# Altium PCB PCB1.PcbDoc
Units mil, origin at the board's own origin, x right, y up, seen from the top; angles counter-clockwise.
Board outline 2674.56 x 3560.03 mil, 2 copper layers (Top Layer, Bottom Layer); 42 components, 36 nets, 219 pads, 0 vias.
Unrouted connection lines stored in the file: 99.
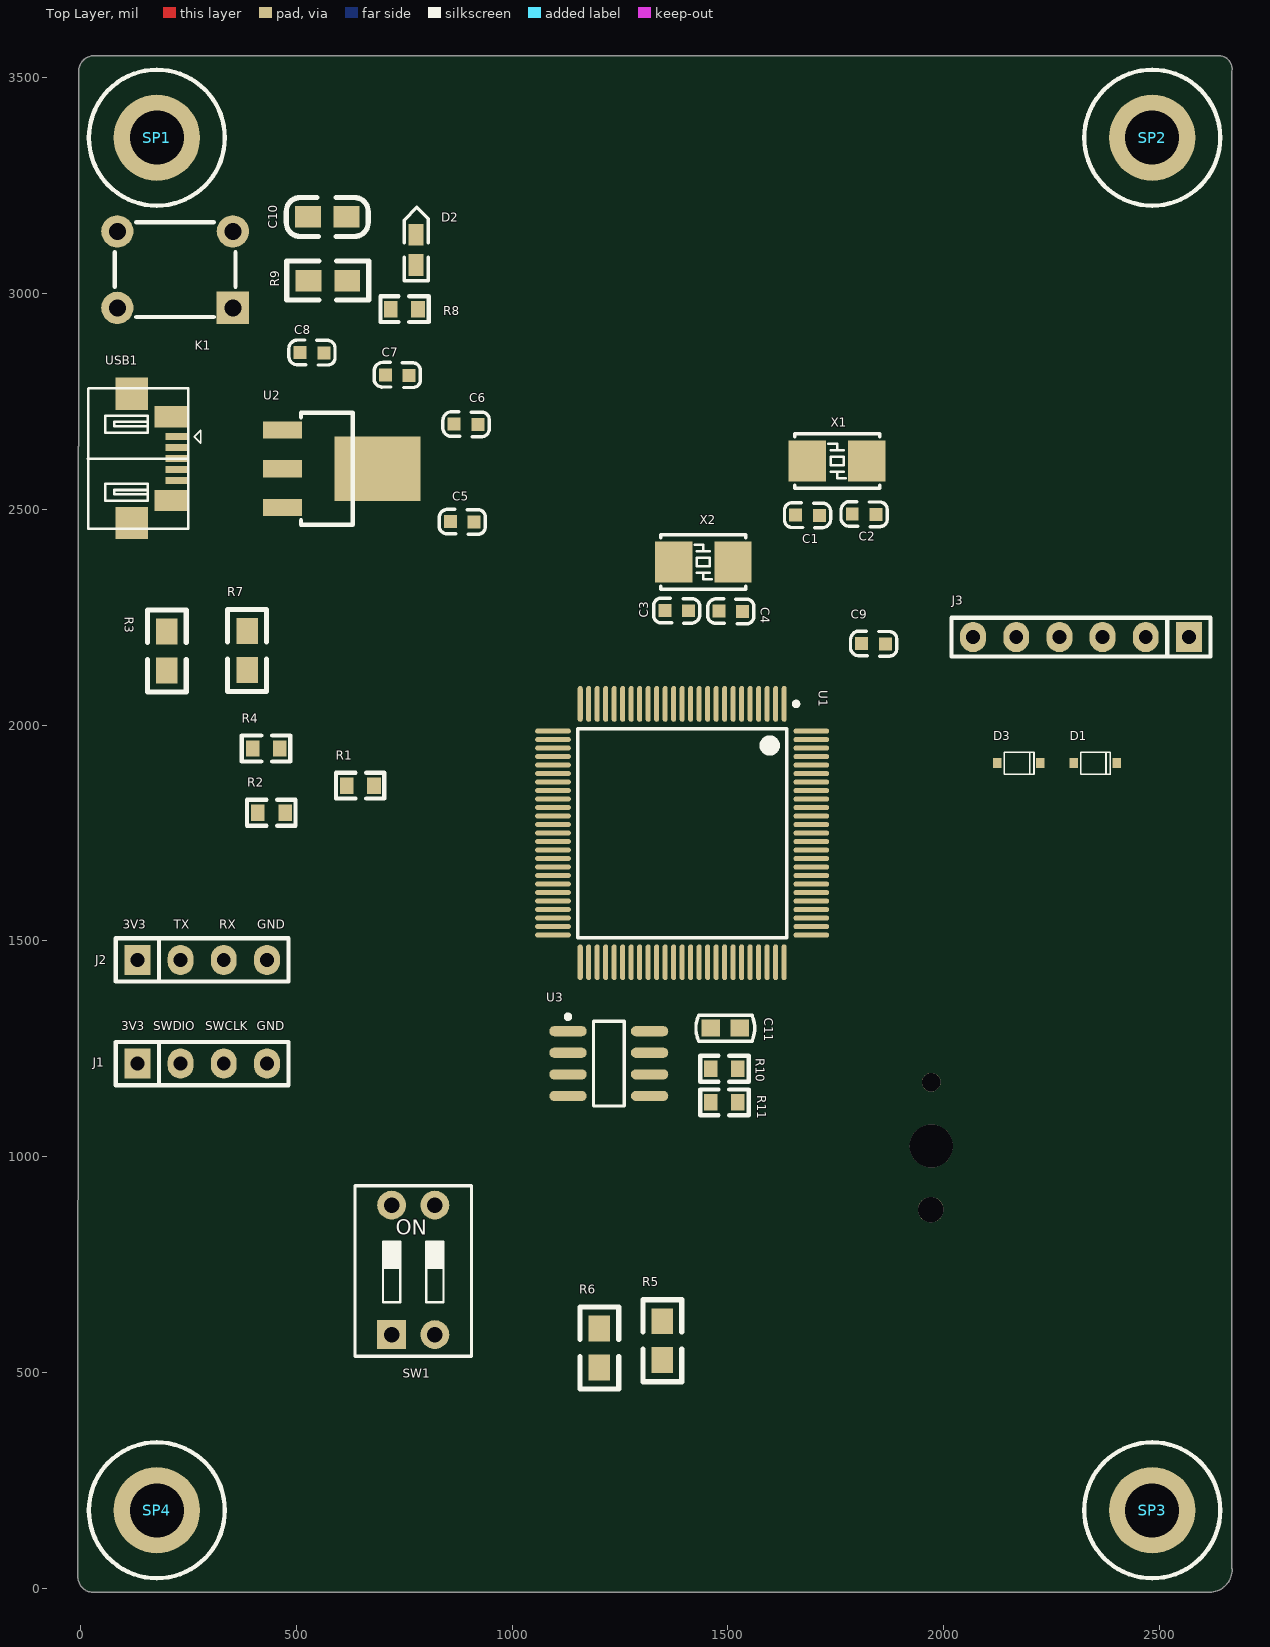
[diagram p0: Top Layer view]
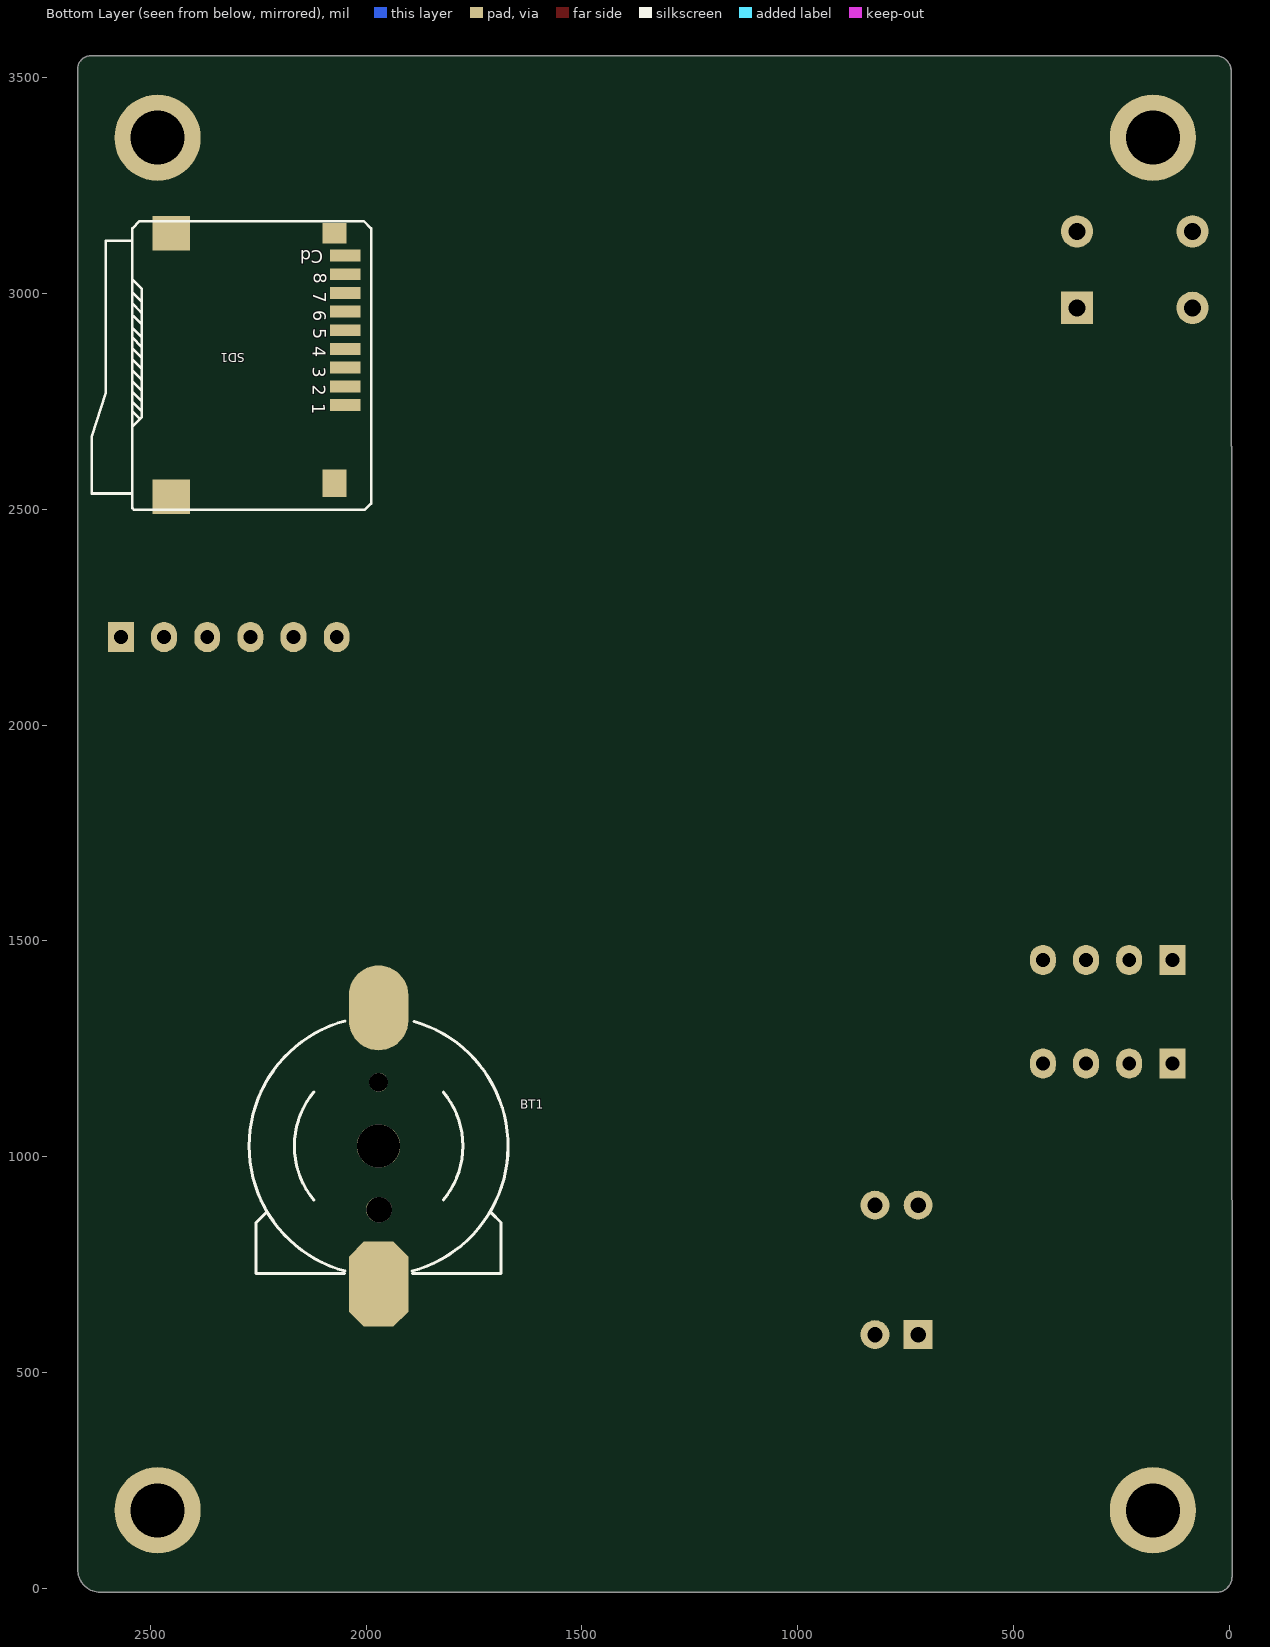
[diagram p1: Bottom Layer view, seen from below]

## Layer stack, top to bottom
Top Solder: solder mask 0.4, Solder Resist, Dk 3.5
Top Layer: signal copper 1.4
Dielectric 1: dielectric 12.6, FR-4, Dk 4.8
Bottom Layer: signal copper 1.4
Bottom Solder: solder mask 0.4, Solder Resist, Dk 3.5

## Board outline
-6.01,25.03 ccw(c30,27) 28.05,-9.01 ccw(c28.32,-4) 28.32,-9.02 2611.2,-9.01 ccw(c2611.2,-4) 2611.54,-9 ccw(c2615,44) 2668.12,44 ccw(c2663.1,44) 2667.74,45.9 2667.74,3515.93 ccw(c2662.84,3516.99) 2667.82,3516.41 ccw(c2637,3520) 2668.03,3520 ccw(c2637,3520) 2636.12,3551.02 32,3551.02 ccw(c32,3515) -3.47,3521.26 ccw(c1.01,3519) -4.01,3519 -6.44,27.08 ccw(c-1.43,27.07)

## Design rules (kind name [scope] priority, off if disabled: settings)
Clearance [All] p1: gap=8 ignorepadtopadclearanceinfootprint=FALSE
PolygonConnect [All] p1: connectstyle=Relief reliefconductorwidth=10 reliefentries=4 polygonreliefangle="90 Angle" airgapwidth=10
RoutingVias [All] p1: holewidth=8 width=10 viastyle="Through Hole" minholewidth=5 minwidth=9 maxholewidth=20 maxwidth=20
SolderMaskExpansion [All] p1: expansion=4 istentingtop=FALSE
Width [All] p1: maxlimit=15 minlimit=5 preferedwidth=8
30 further rules are at their usual default settings.

## Classes and differential pairs
component class Sheet1: BT1 C1 C2 C3 C4 C5 C6 C7 C8 C9 C10 C11 D1 D2 D3 J1 J2 J3 K1 R1 R2 R3 R4 R7 R8 R10 R11 SD1 SP1 SP2 SP3 SP4 SW1 U1 U2 U3 USB1 X1 X2

## Components (designator, comment, footprint, x,y, rotation, side; value= is the part's Value field where it differs from the comment)
BT1 "Battery" CR1220 1971,1025 r180 bottom
C1 "CAP" 0603C 1656.79,2487.35 r0 top
C2 "CAP" 0603C 1843.21,2487.65 r180 top
C3 "CAP" 0603C 1353.79,2266.35 r0 top
C4 "CAP" 0603C 1534.21,2262.65 r180 top
C5 "CAP" 0603C 912,2470 r180 top
C6 "CAP" 0603C 921,2696 r180 top
C7 "CAP" 0603C 761.54,2810 r180 top
C8 "CAP" 0603C 564,2862 r180 top
C9 "0.1uF" 0603C 1865.21,2187.65 r180 top
C10 "0.1uF" 0805C 616,3177 r180 top
C11 "Cap" C-RAD-0603 1494,1298 r180 top value=0.1uF
D1 "DIODE" SOD-323 2301,1912 r0 top
D2 "LED" LED-0603G 778,3066 r90 top
D3 "DIODE" SOD-323 2124,1912 r0 top
J1 "Pin HDR1X4" "Pin HDR1X4/2.54mm-S" 132,1216 r90 top
J2 "Pin HDR1X4" "Pin HDR1X4/2.54mm-S" 132,1456 r90 top
J3 "Female HDR1X6" Fe-HDR1X6/2.54-S 2568,2204 r180 top
K1 "KEY" DIP-6X6X5 353,2966.83 r180 top
R1 "1.5K" 0603R 617.01,1860 r0 top
R2 "22R" 0603R 411,1797 r0 top
R3 "10K" 0805R 200,2217 r270 top
R4 "22R" 0603R 399.01,1946 r0 top
R5 "4.7K" 0805R 1348,529 r90 top
R6 "4.7K" 0805R 1202,512 r90 top
R7 "10K" 0805R 386,2218 r270 top
R8 "510R" 0603R 782,2964 r180 top
R9 "4.7K" 0805R 528,3030 r0 top
R10 "4.7K" 0603R 1523,1204 r180 top
R11 "4.7K" 0603R 1523,1126 r180 top
SD1 "MicroSD" "Micro SD" 2451,3139.24 r270 bottom
SP1 "M3铜柱" M3x5_L 177,3361 r0 top
SP2 "M3铜柱" M3x5_L 2483,3361 r0 top
SP3 "M3铜柱" M3x5_L 2483,181 r0 top
SP4 "M3铜柱" M3x5_L 177,181 r0 top
SW1 "CSW-2P" "CSW DIP-2P" 771,738 r0 top
U1 "STM32F407V" LQFP-100_M 1394,1750 r270 top
U2 "AMS1117" SOT223 468,2594 r270 top
U3 "AT24C02" SOIC8_N 1224,1216 r0 top
USB1 "Micro-USB" USB-MICRO_A 224,2668.5 r270 top
X1 "XTAL-2P" "OSC 5032-2P" 1753,2612 r180 top
X2 "XTAL-2P" "OSC 5032-2P" 1443,2378 r180 top

## Footprints (in the part's own frame and the unit in brackets; to place one, negate y for a bottom-side part, rotate by r counter-clockwise, add the part's x,y. Pads: shape width x height; smd on the part's side, far side on the other; paste and mask are expansions set on the pad)
0603C [mil]
  rect 30x30 smd: 1(0.21,-0.35) 2(55.21,-1.35)
  silkscreen extent -26,-30 81,28, body extent -1,-15 62,17, height 12
0603R [mm]
  rect 0.8x0.965 smd: 1(0,0) 2(1.6,0)
  silkscreen extent -0.64,-0.76 2.21,0.76, body extent -0.04,-0.41 1.56,0.41, height 0.45
0805C [mil]
  rect 60x50 smd: 1(-0.71,-0.4) 2(89.29,-0.4)
  silkscreen extent -51,-45 139,45, body extent 6,-25 84,25, height 31
0805R [mil]
  rect 60x50 smd: 1(0,0) 2(90,0)
  silkscreen extent -50,-45 140,45, body extent 1,-25 80,25, height 15
C-RAD-0603 [mm] "贴片电容"
  rect 1.1x1 smd: 1(-0.85,0) 2(0.85,0)
  silkscreen extent -1.73,-0.76 1.73,0.76, body extent -1.14,-0.38 1.14,0.38, height 1
CR1220 [mm] "钮扣电池"
  round 2.54 hole 2.54: 0(0,0)
  round 1.1 hole 1.1: 0(0,3.75)
  round 1.5 hole 1.5: 0(0.025,-3.75)
  oct 3.5x5 smd: 1(0,-8.128)
  oval 3.5x5 smd: 2(0,8.128)
  silkscreen extent -7.62,-7.5 7.62,7.36
"CSW DIP-2P" [mm] "6.6*9.9*7mm"
  rect 1.7x1.7 hole 0.9: 1(-1.27,-3.81)
  round 1.7 hole 0.9: 2(1.27,-3.81) 3(1.27,3.81) 4(-1.27,3.81)
  silkscreen extent -3.43,-5.08 3.43,4.95, body extent -3.32,-4.95 3.32,4.95, height 6.65
DIP-6X6X5 [mm]
  rect 1.9x1.9 hole 1: 1(0,0)
  round 1.9 hole 1: 2(0,-4.5) 3(6.8,-4.5) 4(6.8,0)
  silkscreen extent -0.16,-5.04 6.96,0.54, body extent -0.8,-5.24 7.41,0.76, height 4.95
Fe-HDR1X6/2.54-S [mil]
  rect 60x70 hole 32: 1(0,0)
  oval 60x70 hole 32: 2(100,0) 3(200,0) 4(300,0) 5(400,0) 6(500,0)
  silkscreen extent -50,-45 550,45, body extent -55,-49 555,49, height 109
LED-0603G [mil]
  rect 50x35 smd: A(0,0.26) K(70,0.26)
  silkscreen extent -36,-28 134,28, body extent 4,-15 66,17, height 24
LQFP-100_M [mm] "Thin QFP, 100"
  oval 2.1x0.3 smd: 1(-7.6,6) 2(-7.6,5.5) 3(-7.6,5) 4(-7.6,4.5) 5(-7.6,4) 6(-7.6,3.5) 7(-7.6,3) 8(-7.6,2.5) 9(-7.6,2) 10(-7.6,1.5) 11(-7.6,1) 12(-7.6,0.5) 13(-7.6,0) 14(-7.6,-0.5) 15(-7.6,-1) 16(-7.6,-1.5) 17(-7.6,-2) 18(-7.6,-2.5) 19(-7.6,-3) 20(-7.6,-3.5) 21(-7.6,-4) 22(-7.6,-4.5) 23(-7.6,-5) 24(-7.6,-5.5) 25(-7.6,-6) 51(7.6,-6) 52(7.6,-5.5) 53(7.6,-5) 54(7.6,-4.5) 55(7.6,-4) 56(7.6,-3.5) 57(7.6,-3) 58(7.6,-2.5) 59(7.6,-2) 60(7.6,-1.5) 61(7.6,-1) 62(7.6,-0.5) 63(7.6,0) 64(7.6,0.5) 65(7.6,1) 66(7.6,1.5) 67(7.6,2) 68(7.6,2.5) 69(7.6,3) 70(7.6,3.5) 71(7.6,4) 72(7.6,4.5) 73(7.6,5) 74(7.6,5.5) 75(7.6,6)
  oval 0.3x2.1 smd: 26(-6,-7.6) 27(-5.5,-7.6) 28(-5,-7.6) 29(-4.5,-7.6) 30(-4,-7.6) 31(-3.5,-7.6) 32(-3,-7.6) 33(-2.5,-7.6) 34(-2,-7.6) 35(-1.5,-7.6) 36(-1,-7.6) 37(-0.5,-7.6) 38(0,-7.6) 39(0.5,-7.6) 40(1,-7.6) 41(1.5,-7.6) 42(2,-7.6) 43(2.5,-7.6) 44(3,-7.6) 45(3.5,-7.6) 46(4,-7.6) 47(4.5,-7.6) 48(5,-7.6) 49(5.5,-7.6) 50(6,-7.6) 76(6,7.6) 77(5.5,7.6) 78(5,7.6) 79(4.5,7.6) 80(4,7.6) 81(3.5,7.6) 82(3,7.6) 83(2.5,7.6) 84(2,7.6) 85(1.5,7.6) 86(1,7.6) 87(0.5,7.6) 88(0,7.6) 89(-0.5,7.6) 90(-1,7.6) 91(-1.5,7.6) 92(-2,7.6) 93(-2.5,7.6) 94(-3,7.6) 95(-3.5,7.6) 96(-4,7.6) 97(-4.5,7.6) 98(-5,7.6) 99(-5.5,7.6) 100(-6,7.6)
  silkscreen extent -7.72,-6.15 6.15,6.83, body extent -7,-7 7,7, height 0.8
M3x5_L [mil] "M3铜柱，长：5mm"
  round 200 hole 125: 1(0,0)
  silkscreen extent -157,-157 157,157, body extent -106,-93 106,93, height 199
"Micro SD" [mm]
  rect 2.032x2.2 smd: 0(0,0) 0(15.5,0)
  rect 1.2x1.4 smd: 0(0,9.6)
  rect 1.6x1.4 smd: 0(14.7,9.6)
  rect 0.7x1.8 smd: 1(10.1,10.227) 2(9,10.227) 3(7.9,10.227) 4(6.8,10.227) 5(5.7,10.227) 6(4.6,10.227) 7(3.5,10.227) 8(2.4,10.227) 9(1.3,10.227)
  silkscreen extent -0.72,-4.68 16.27,11.75, body extent -0.27,-4.63 16,10.57, height 1.8
"OSC 5032-2P" [mm]
  rect 2.2x2.4 smd: 1(-1.75,0) 2(1.75,0)
  silkscreen extent -2.5,-1.6 2.5,1.6, body extent -2.5,-1.52 2.5,1.68, height 0.86
"Pin HDR1X4/2.54mm-S" [mil]
  rect 70x60 hole 32: 1(0,0)
  oval 70x60 hole 32: 2(0,-100) 3(0,-200) 4(0,-300)
  silkscreen extent -50,-350 50,50, body extent -50,-350 50,50, height 336
SOD-323 [mm] "塑封二极管"
  rect 0.5x0.6 smd: A(0,0) K(2.54,0)
  silkscreen extent 0.41,-0.65 2.16,0.65, body extent 0.02,-0.64 2.52,0.62, height 0.9
SOIC8_N [mm] "8-Pin Small Outline Integrated Circuit Package (SOIC8), IPC Medium Density"
  oval 2.2x0.6 smd: 1(-2.4,1.905) 2(-2.4,0.635) 3(-2.4,-0.635) 4(-2.4,-1.905) 5(2.4,-1.905) 6(2.4,-0.635) 7(2.4,0.635) 8(2.4,1.905)
  silkscreen extent -2.52,-2.5 0.9,2.88, body extent -1.95,-2.45 1.95,2.45, height 1.75
SOT223 [mil]
  rect 40x90 smd: 1(-90,0) 2(0,0) 3(90,0)
  rect 150x200 smd: 2(0,220)
  silkscreen extent -130,43 130,163, body extent -130,-30 126,246, height 65
USB-MICRO_A [mm]
  rect 1.9x1.9 smd: 0(-2.515,-2.667) 0(5.08,-2.667)
  rect 0.4x1.4 smd: 1(0,0) 2(0.648,0) 3(1.295,0) 4(1.943,0) 5(2.591,0)
  rect 1.25x2 smd: 5(-1.168,-0.33) 5(3.759,-0.33)
  silkscreen extent -2.84,-5.24 5.41,1.4, body extent -2.71,-5.08 5.25,0.34, height 2.69

## Part data
BT1: "备份电池", LatestRevisionDate=17-Jul-2002, LatestRevisionNote="Re-released for DXP Platform.", PackageReference=BAT-2, Published=24-Mar-1999, Publisher="Altium Limited"
C1 C2 C3 C4 C5 C6 C7 C8 C11: "无极性电容"
  C11: LatestRevisionDate=17-Jul-2002, LatestRevisionNote="Re-released for DXP Platform.", PackageReference=RAD-0.3, Published=8-Jun-2000, Publisher="Altium Limited"
C9 C10: library part CAP, "无极性电容"
D1 D3: "普通二极管"
R1 R2 R3 R4 R5 R6 R7 R8 R9 R10 R11: library part RES
SP1 SP2 SP3 SP4: library part 铜柱小焊盘, "铜柱", BOM名称=铜柱, 版权归属=源创客, 学习资源=www.ooocke.com
SW1: "2路编码开关", BOM名称=2路编码开关, 版权归属=源创客, 学习资源=www.ooocke.com
U1: "STM32单片机100引脚"
U2: "三端稳压芯片"
U3: "EEROM存储器"
X1 X2: "2脚无源脚晶振"

## Nets (pads, with @x,y where several pads share a name; then routed paths per layer and width w, separated by ;. In a path a pad name is that pad's centre, name@x,y a point inside that pad or via, vN(x,y) a via of type N, cw(c..) or ccw(c..) an arc to the next point about the centre after c; other vN are vias at no path point)
3V3: C7.2 C8.2 C11.1 D1.A J1.1 J2.1 J3.2 R1.1 R5.1 R6.1 R8.2 R9.2 R10.1 R11.1 SD1.4 U2.2 U3.8
5V: C5.2 C6.2 U2.3 USB1.1
BOOT0: R3.1 SW1.4 U1.94
BOOT1: R7.2 SW1.3 U1.37
GND: BT1.2 C1.1 C2.1 C3.1 C4.1 C5.1 C6.1 C7.1 C8.1 C9.1 C10.1 C11.2 D2.K J1.4 J2.4 J3.1 K1.1 R3.2 R7.1 SD1.0 SD1.6 U2.1 U3.1 U3.2 U3.3 U3.4 U3.7 USB1.4 USB1.5
IIC_SCL: R10.2 U1.92 U3.6
IIC_SDA: R11.2 U1.93 U3.5
NetBT1_1: BT1.1 D3.A
NetD2_A: D2.A R8.1
NetR2_1: R2.1 USB1.2
NetR4_1: R4.1 USB1.3
NetR5_2: R5.2 SW1.1
NetR6_2: R6.2 SW1.2
OLED_DC: J3.6 U1.51
OLED_RST: J3.5 U1.53
OSC_25M_IN: C4.2 U1.12 X2.1
OSC_25M_OUT: C3.2 U1.13 X2.2
RST: C10.2 K1.3 R9.1 U1.14
RTC_32768_IN: C2.2 U1.8 X1.1
RTC_32768_OUT: C1.2 U1.9 X1.2
SD_Check: SD1.9 U1.77
SD_CLK: SD1.5 U1.80
SD_CMD: SD1.3 U1.83
SD_D0: SD1.7 U1.65
SD_D1: SD1.8 U1.66
SD_D2: SD1.1 U1.78
SD_D3: SD1.2 U1.79
SPI2_CLK: J3.3 U1.52
SPI2_MOSI: J3.4 U1.54
SWD_CLK: J1.3 U1.76
SWD_DIO: J1.2 U1.72
USART1_RX: J2.3 U1.68
USART1_TX: J2.2 U1.69
USB_DM: R2.2 U1.70
USB_DP: R1.2 R4.2 U1.71
V_RTC: C9.2 D1.K D3.K U1.6
pads on no net: BT1.0 K1.2 K1.4 SP1.1 SP2.1 SP3.1 SP4.1 U1.1 U1.2 U1.3 U1.4 U1.5 U1.7 U1.10 U1.11 U1.15 U1.16 U1.17 U1.18 U1.19 U1.20 U1.21 U1.22 U1.23 U1.24 U1.25 U1.26 U1.27 U1.28 U1.29 U1.30 U1.31 U1.32 U1.33 U1.34 U1.35 U1.36 U1.38 U1.39 U1.40 U1.41 U1.42 U1.43 U1.44 U1.45 U1.46 U1.47 U1.48 U1.49 U1.50 U1.55 U1.56 U1.57 U1.58 U1.59 U1.60 U1.61 U1.62 U1.63 U1.64 U1.67 U1.73 U1.74 U1.75 U1.81 U1.82 U1.84 U1.85 U1.86 U1.87 U1.88 U1.89 U1.90 U1.91 U1.95 U1.96 U1.97 U1.98 U1.99 U1.100 USB1.0

## Silkscreen, mask and mechanical layers (free items; w line width, h text height)
Top Overlay:
  text "3V3" at 98,1528 h20
  text "TX" at 216,1528 h20
  text "RX" at 321,1528 h20
  text "GND" at 410,1528 h20
  text "3V3" at 94,1293 h20
  text "SWDIO" at 169,1293 h20
  text "SWCLK" at 289,1293 h20
  text "GND" at 408,1293 h20
Mechanical 1:
  lines w10: -1.43,27.07 1.01,3519 ; -1.05,27.07 ccw(c30,27) 28.32,-4 2611.2,-4 ; 1.25,3518.97 cw(c32,3515) 32,3546 2636.2,3546 cw(c2637,3520) 2662.84,3516.99 ; 2611.2,-3.95 ccw(c2615,44) 2663.1,44 ; 2662.72,38 2662.73,3517

## Text inside footprints (layer, text, board x,y; h text height)
SD1: Bottom Overlay "1" at 2124.36,2745.6 h30 r90; Bottom Overlay "2" at 2123.36,2788.6 h30 r90; Bottom Overlay "3" at 2123.36,2830.6 h30 r90; Bottom Overlay "4" at 2123.36,2877.6 h30 r90; Bottom Overlay "5" at 2122.36,2919.6 h30 r90; Bottom Overlay "6" at 2122.36,2961.6 h30 r90; Bottom Overlay "7" at 2122.36,3003.6 h30 r90; Bottom Overlay "8" at 2121.36,3047.6 h30 r90; Bottom Overlay "Cd" at 2099.36,3100.6 h30 r180
SW1: Top Overlay "ON" at 731,808 h60